# EAGLE board MCP73832_BOB (EAGLE 6.4)
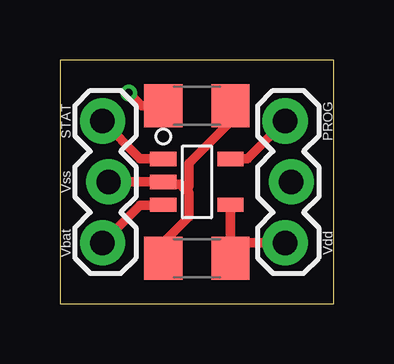
[diagram p0: board, top side]
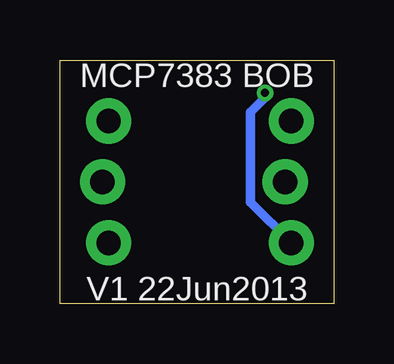
[diagram p1: board, bottom side, seen from below]

Size 11.43 x 10.16 mm. Coordinates in mm from the lower left corner, seen from the top.
Outline: 0,0 11.43,0 11.43,10.16 0,10.16 0,0
Copper layers (1*16): Top 0.0356mm / dielectric 1.5011mm / Bottom 0.0356mm
Design rules "LaenPCBOrder": minimum track width 6mil, minimum drill 13mil, track to track 6mil, track to pad 6mil, pad to pad 6mil, via to via 6mil, smd to smd 6mil, copper to edge 15mil, drill to drill 6mil, minimum pad ring 7mil, minimum via ring 7mil, stop-mask expansion 4mil, vias tented up to drill 0mil, thermal gap 10mil
Net classes: 0 default: width 0.4 mm, clearance 0.3 mm

## Footprints (pad centres in the part's own frame; a part is rotated, then mirrored left to right if it is on the bottom)
1206 = smd 1.6 x 1.8: 1 -1.4,0; 2 1.4,0
1X03_LOCK = drill 1.016 pad 1.88: 1 0,0.127; 2 2.54,-0.127; 3 5.08,0.127
SOT-23(OT)5_LEAD = smd 0.6 x 1.1: 1 -0.95,-1.4; 2 0,-1.4; 3 0.95,-1.4; 4 0.95,1.4; 5 -0.95,1.4

## Placement (x,y rotation side)
C1  [1206]  5.72,8.25 0 top
C2  [1206]  5.72,1.91 180 top
JP1  [1X03_LOCK]  1.91,2.54 90 top
JP2  [1X03_LOCK]  9.53,2.54 90 top
U$2  MCP73832  [SOT-23(OT)5_LEAD]  5.72,5.08 270 top

## Library data of the parts
C1 C2 JP1 JP2 = SparkFun
U$2 = ERIC

## Nets
GND: C1.2 C2.2 JP1.2 U$2.2
N$1: C1.1 JP1.1 U$2.3
N$3: JP1.3 U$2.1
N$4: JP2.3 U$2.5
N$5: C2.1 JP2.1 U$2.4

## Tracks (layer width: path | path; a pad name or v marks a point on that pad's centre or on a via)
GND
  Top 0.4: JP1.2 U$2.2 4.5,4.98 5.03,4.98 5.24,4.76 | 5.24,4.76 5.38,4.62 5.38,3.63 4.32,2.57 C2.2 | C1.2 7.11,7.6 5.38,5.87 5.38,4.9 5.24,4.76
N$1  (via drill 0.33)
  Top 0.4: JP1.1 3.35,4.12 4.29,4.12 U$2.3 | C1.1 3.4,8.25 v2.87,8.79
  Bottom 0.4: v2.87,8.79 2.87,8.59 3.48,7.98 3.48,4.24 JP1.1
N$3
  Top 0.4: JP1.3 3.35,6.05 4.29,6.05 U$2.1
N$4
  Top 0.4: JP2.3 7.82,6.05 7.14,6.05 U$2.5
N$5
  Top 0.4: U$2.4 7.11,4.12 C2.1 7.29,2.54 JP2.1

## Text on the board
tDocu: 1
_tsilk: STAT | PROG | Vss | Vbat | Vdd
_bsilk: MCP7383 BOB | V1 22Jun2013